# Altium PCB bh_gateway_alph.PcbDoc
Units mil, origin at the board's own origin, x right, y up, seen from the top; angles counter-clockwise.
Board outline 2362.2 x 2362.2 mil, 2 copper layers (Top Layer, Bottom Layer); 6 components, 32 nets, 68 pads, 8 vias.
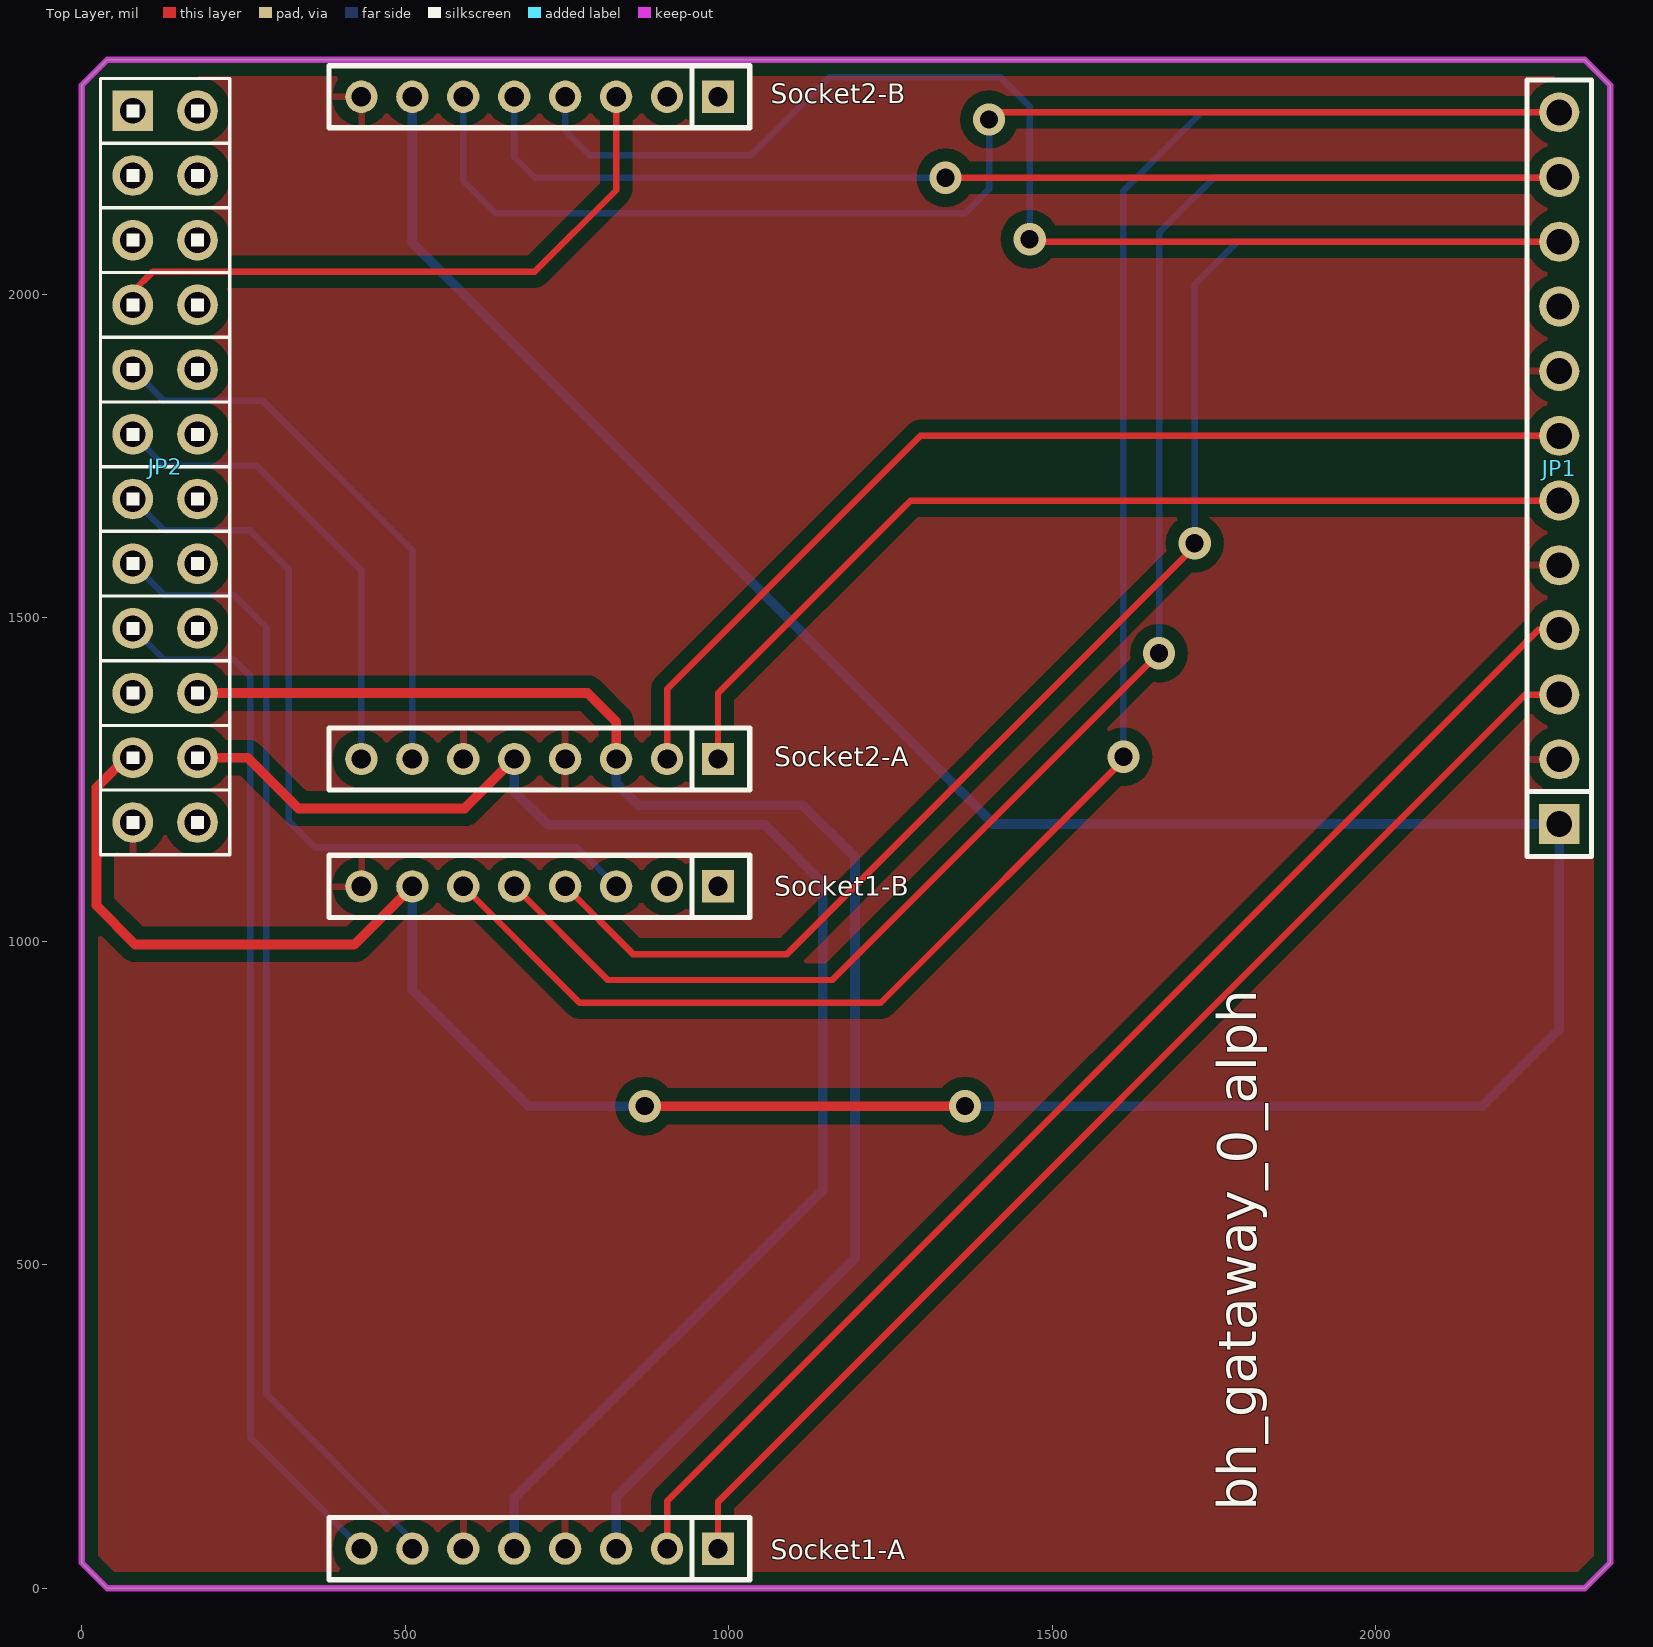
[diagram p0: Top Layer view]
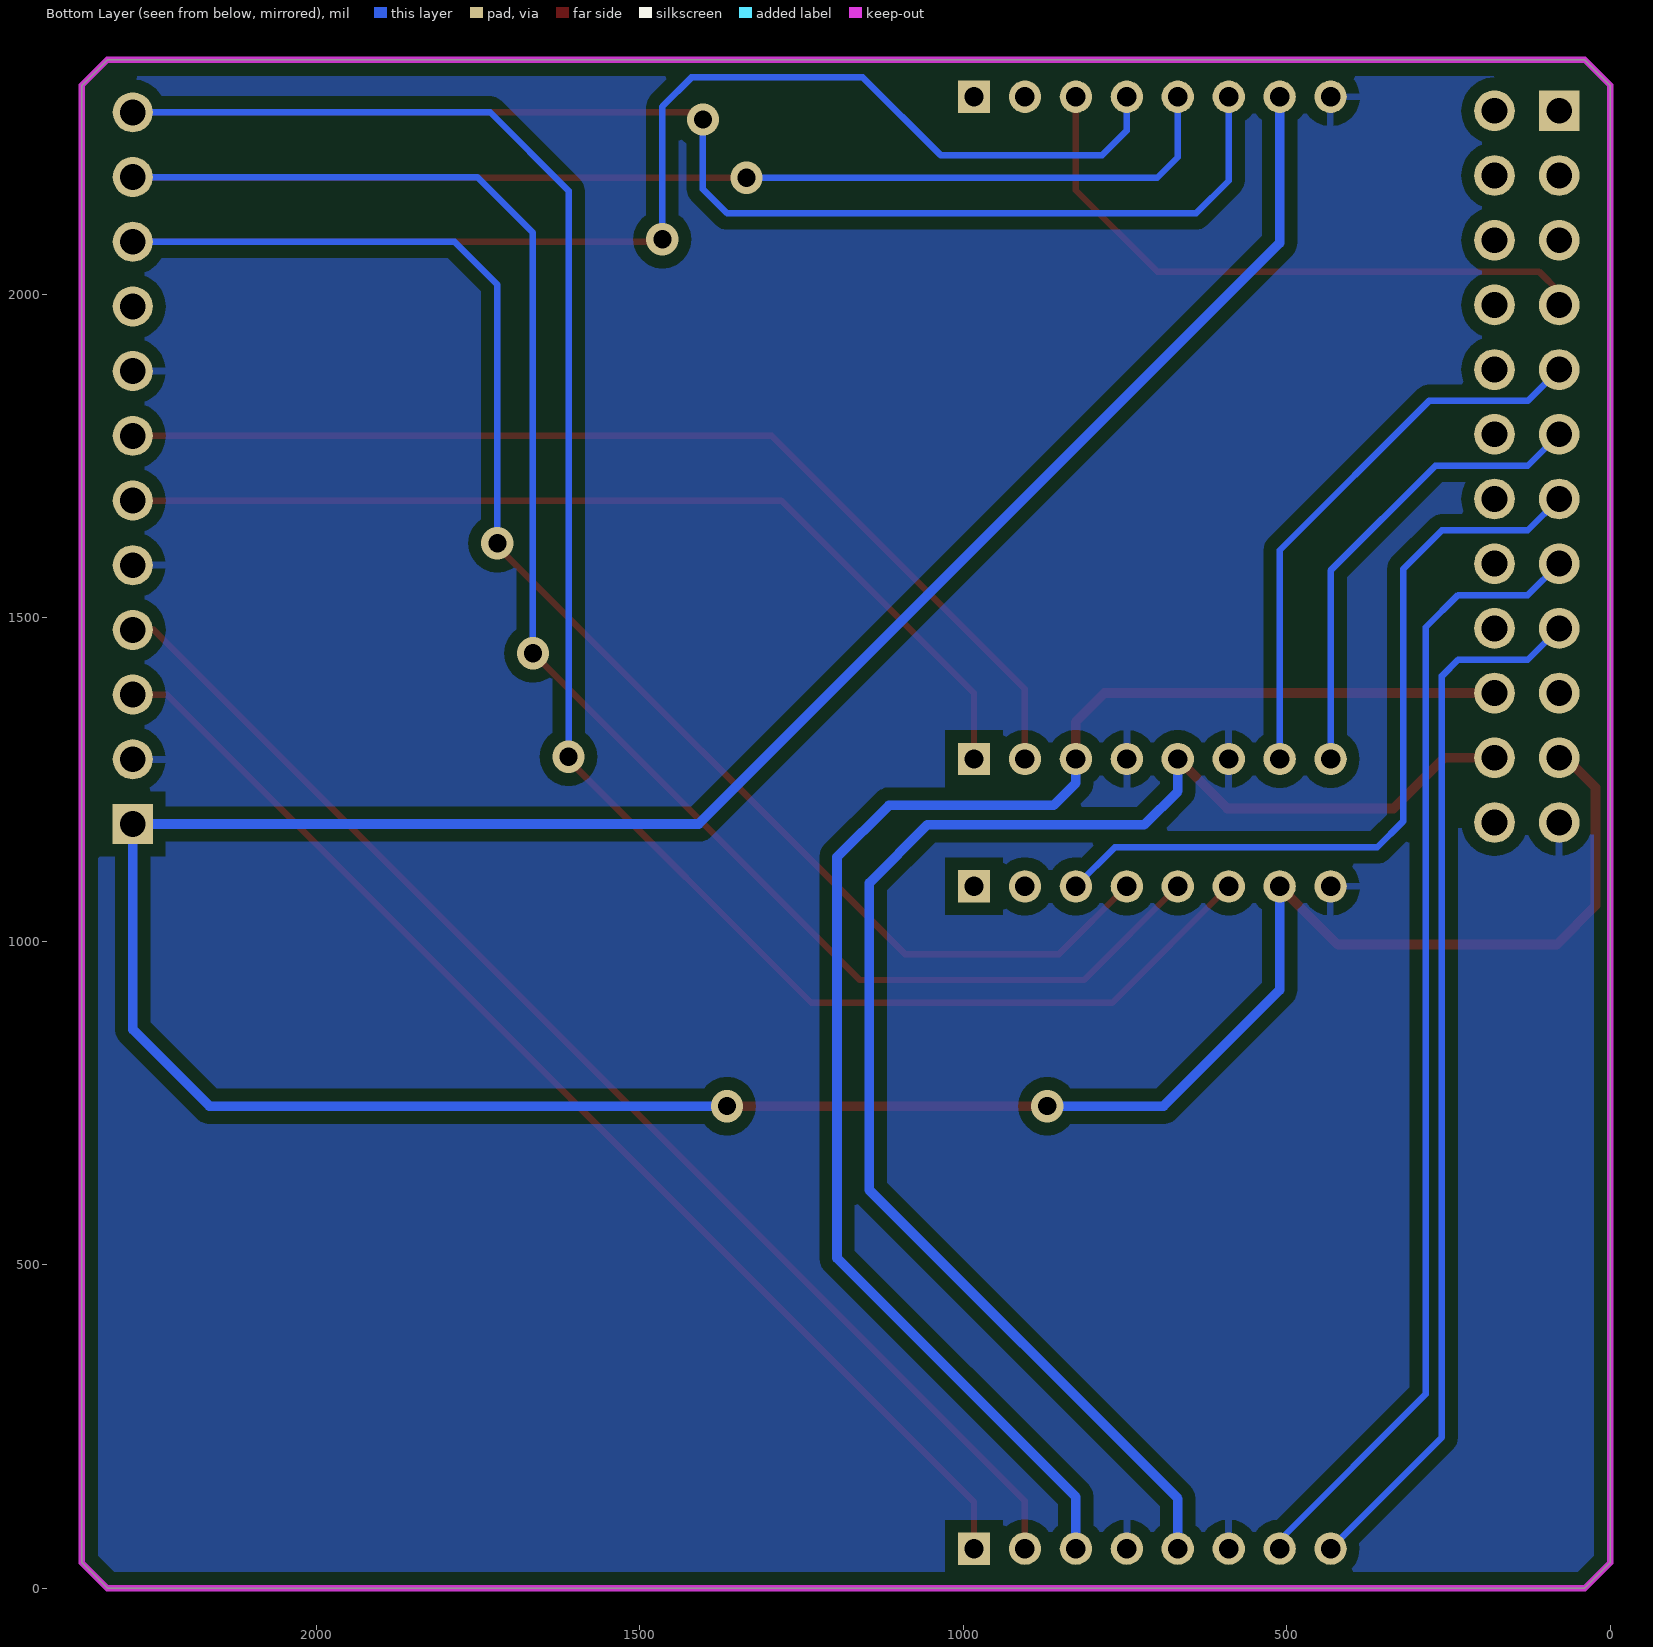
[diagram p1: Bottom Layer view, seen from below]

## Layer stack, top to bottom
Top Layer: signal copper 1.4
Dielectric: dielectric 12.6, FR-4, Dk 4.8
Bottom Layer: signal copper 1.4

## Board outline
0,2322.83 39.37,2362.2 2322.83,2362.2 2362.2,2322.83 2362.2,39.37 2322.83,0 39.37,0 0,39.37

## Design rules (kind name [scope] priority, off if disabled: settings)
Clearance Clearance_1 [(InPolygon)] p1: gap=20
Clearance [All] p2: gap=10
PolygonConnect [All] p1: connectstyle=Relief reliefconductorwidth=10 reliefentries=4 polygonreliefangle="90 Angle"
RoutingVias [All] p1: holewidth=28 width=50 viastyle="Through Hole" minholewidth=28 minwidth=50 maxholewidth=28 maxwidth=50
SilkToSilkClearance [All] p1: silktosilkclearance=8
SilkscreenOverComponentPads [All] p1 off: minsilkscreentomaskgap=10
SolderMaskExpansion [All] p1: expansion=4
Width Width_1 [(InNet('GND') OR InNet('VBUS') OR InNet('VCC_BASE_5V') OR InNet('VCC_SENSOR_3.3V') OR InNet('VCC_SENSOR_5V'))] p1: maxlimit=15 minlimit=15 preferedwidth=15 minimp=50.000000 maximp=50.000000 favimp=50.000000
Width [All] p2: maxlimit=10 minlimit=10 preferedwidth=10
26 further rules are at their usual default settings.

## Components (designator, comment, footprint, x,y, rotation, side; value= is the part's Value field where it differs from the comment)
JP1 "SPI/UART Connector" SIP1x12x2.54 2283.46,1181.1 r90 top locked
JP2 "Sensor Connector" SIP2X12X2.54 78.74,2283.46 r270 top locked
Socket1-A "Socket1-A" SIP1x8x2.0 984.25,59.06 r180 top (schematic designator JP3)
Socket1-B "Socket1-B" SIP1x8x2.0 984.25,1082.68 r180 top (schematic designator JP4)
Socket2-A "Socket2-A" SIP1x8x2.0 984.25,1279.53 r180 top (schematic designator JP5)
Socket2-B "Socket2-B" SIP1x8x2.0 984.25,2303.15 r180 top (schematic designator JP6)

## Footprints (in the part's own frame and the unit in brackets; to place one, negate y for a bottom-side part, rotate by r counter-clockwise, add the part's x,y. Pads: shape width x height; smd on the part's side, far side on the other; paste and mask are expansions set on the pad)
SIP1x8x2.0 [mil]
  rect 50x50 hole 30: 1(1,-2)
  round 50 hole 30: 2(79.74,-2) 3(158.48,-2) 4(237.22,-2) 5(315.96,-2) 6(394.7,-2) 7(473.44,-2) 8(552.18,-2)
  silkscreen extent -48,-50 602,46
SIP1x12x2.54 [mil]
  rect 62x62 hole 40: 1(0,0)
  round 62 hole 40: 2(100,0) 3(200,0) 4(300,0) 5(400,0) 6(500,0) 7(600,0) 8(700,0) 9(800,0) 10(900,0) 11(1000,0) 12(1100,0)
  silkscreen extent -50,-50 1150,50
SIP2X12X2.54 [mil]
  rect 63x63 hole 40: 1(0,0)
  round 63 hole 40: 2(0,100) 3(100,0) 4(100,100) 5(200,0) 6(200,100) 7(300,0) 8(300,100) 9(400,0) 10(400,100) 11(500,0) 12(500,100) 13(600,0) 14(600,100) 15(700,0) 16(700,100) 17(800,0) 18(800,100) 19(900,0) 20(900,100) 21(1000,0) 22(1000,100) 23(1100,0) 24(1100,100)
  silkscreen extent -50,-50 1150,150, body extent -51,-52 1148,150, height 340

## Part data
JP1: library part SIP1X12, "单排排针直角"
JP2: library part SIP2X12, "双排排针直角"
Socket1-A Socket2-A: library part SIP1X8
Socket1-B Socket2-B: library part SIP1X8, "8 Pin Header"

## Via types
v1: diameter 50, hole 28, Top Layer to Bottom Layer, 8 vias

## Nets (pads, with @x,y where several pads share a name; then routed paths per layer and width w, separated by ;. In a path a pad name is that pad's centre, name@x,y a point inside that pad or via, vN(x,y) a via of type N, cw(c..) or ccw(c..) an arc to the next point about the centre after c; other vN are vias at no path point)
AD0: JP2.18
AD1: JP2.16
AD2: JP2.14
AD3: JP2.12
AD4: JP2.10
AD5: JP2.8
AD6: JP2.6
AD7: JP2.4
EX_RXD2: JP1.4 Socket1-A.2 | length 2010.2
  Top Layer w10: Socket1-A.2 904.51,134.51 2251.1,1481.1 JP1.4
EX_RXD5: JP1.7 Socket2-A.2 | length 1649.1
  Top Layer w10: Socket2-A.2 904.51,1389.51 1296.1,1781.1 JP1.7
EX_SPI_CS: JP1.9
EX_TXD2: JP1.3 Socket1-A.1 | length 1889.3
  Top Layer w10: Socket1-A.1 983.25,133.25 2231.1,1381.1 JP1.3
EX_TXD5: JP1.6 Socket2-A.1 | length 1525.3
  Top Layer w10: Socket2-A.1 983.25,1383.25 1281.1,1681.1 JP1.6
GND: JP1.2 JP1.5 JP1.8 JP2.23 Socket1-A.4 Socket1-A.6 Socket1-B.8 Socket2-A.4 Socket2-A.6 Socket2-B.8
IO1: JP2.17 Socket1-A.8 | length 1631.9
  Bottom Layer w10: JP2.17 127.2,1435 235,1435 260,1410 260,233.13 Socket1-A.8
IO2: JP2.15 Socket1-A.7 | length 1764.5
  Bottom Layer w10: JP2.15 127.2,1535 235,1535 285,1485 285,300 510.81,74.19 Socket1-A.7
IO3: JP2.13 Socket1-B.3 | length 1223.5
  Bottom Layer w10: JP2.13 127.2,1635 260,1635 320,1575 320,1185 360,1145 765.45,1145 Socket1-B.3
IO4: JP2.11 Socket2-A.8 | length 731.9
  Bottom Layer w10: JP2.11 127.2,1735 270,1735 432.07,1572.93 Socket2-A.8
IO5: JP2.9 Socket2-A.7 | length 870.4
  Bottom Layer w10: JP2.9 127.2,1835 280,1835 510.81,1604.19 Socket2-A.7
IO6: JP2.7 Socket2-B.3 | length 976.7
  Top Layer w10: JP2.7 78.74,2003.74 110,2035 700,2035 825.77,2160.77 Socket2-B.3
IO7: JP2.5
IO8: JP2.3
ONE_WIRE: JP2.19
SCL: JP2.2
SCLK: JP1.11 Socket1-B.5 Socket2-B.5 | length 4322.1
  Top Layer w10: Socket1-B.5 812.97,940 1160,940 1660,1440 1680,1440 1675,1445 v1(1665,1445) ; v1(1335,2180) 2282.36,2180 JP1.11
  Bottom Layer w10: Socket2-B.5 668.29,2211.71 700,2180 v1(1335,2180) ; v1(1665,1445) 1665,2095 1751.1,2181.1 JP1.11
SDA: JP2.1
SIMO: JP1.10 Socket1-B.4 Socket2-B.4 | length 4193.6
  Top Layer w10: Socket1-B.4 851.71,980 1090,980 1720,1610 1730,1610 1740,1620 1730,1620 1725,1615 v1(1720,1615) ; v1(1465,2085) 1468.9,2081.1 JP1.10
  Bottom Layer w10: Socket2-B.4 747.03,2252.97 785,2215 1035,2215 1155,2335 1420,2335 1465,2290 v1(1465,2085) ; v1(1720,1615) 1720,2015 1786.1,2081.1 JP1.10
SOMI: JP1.12 Socket1-B.6 Socket2-B.6 | length 4884.2
  Top Layer w10: Socket1-B.6 769.23,905 1235,905 1620,1290 1620,1295 v1(1610,1285) ; v1(1402.2,2270) 1402.2,2280 1406.1,2283.9 1406.1,2281.1 JP1.12
  Bottom Layer w10: Socket2-B.6 589.55,2175.45 640,2125 1365,2125 1402.2,2162.2 1402.2,2280 v1(1402.2,2270) ; v1(1610,1285) 1610,2160 1731.1,2281.1 JP1.12
VBUS: JP1.1 JP2.21 Socket1-B.7 Socket2-B.7 | length 5552.8
  Top Layer w15: JP2.21 68.46,1283.46 22.5,1237.5 22.5,1055 82.5,995 421.13,995 Socket1-B.7 ; v1(870,745) v1(1365,745)
  Bottom Layer w15: Socket1-B.7 510.81,924.19 690,745 v1(870,745) ; Socket2-B.7 510.81,2079.19 1408.9,1181.1 JP1.1 2283.46,863.46 2165,745 v1(1365,745)
VCC_BASE_5V: JP2.24
VCC_SENSOR_3.3V: JP2.22 Socket1-A.5 Socket2-A.5 | length 2365.4
  Top Layer w15: JP2.22 256.54,1283.46 335,1205 591.76,1205 Socket2-A.5
  Bottom Layer w15: Socket1-A.5 668.29,138.29 1145,615 1145,1090 1055,1180 720,1180 668.29,1231.71 Socket2-A.5
VCC_SENSOR_5V: JP2.20 Socket1-A.3 Socket2-A.3 | length 2398.8
  Top Layer w15: JP2.20 781.54,1383.46 825.77,1339.23 Socket2-A.3
  Bottom Layer w15: Socket1-A.3 825.77,140.77 1195,510 1195,1130 1115,1210 860,1210 825.77,1244.23 Socket2-A.3
pads on no net: Socket1-B.1 Socket1-B.2 Socket2-B.1 Socket2-B.2

## Polygon pours and split planes (outlines as drawn)
GND on Bottom Layer "Top Layer-No Net" (solid, remove dead copper, pour order 1000): 39.37,0 0,39.37 0,2322.83 39.37,2362.2 2322.83,2362.2 2362.2,2322.83 2362.2,39.37 2322.83,0
GND on Top Layer "Top Layer-No Net" (solid, remove dead copper, pour order 1001): 39.37,0 0,39.37 0,2322.83 39.37,2362.2 2322.83,2362.2 2362.2,2322.83 2362.2,39.37 2322.83,0

## Keep-outs
Keep-Out Layer:
  the board outline again, w10

## Silkscreen, mask and mechanical layers (free items; w line width, h text height)
Top Overlay:
  text "bh_gataway_0_alph" at 1815,120 h60 r90